# Altium PCB PCB3.PcbDoc
Units mil, origin at the board's own origin, x right, y up, seen from the top; angles counter-clockwise.
Board outline 2560 x 1820 mil, 2 copper layers (Top Layer, Bottom Layer); 9 components, 40 nets, 85 pads, 0 vias.
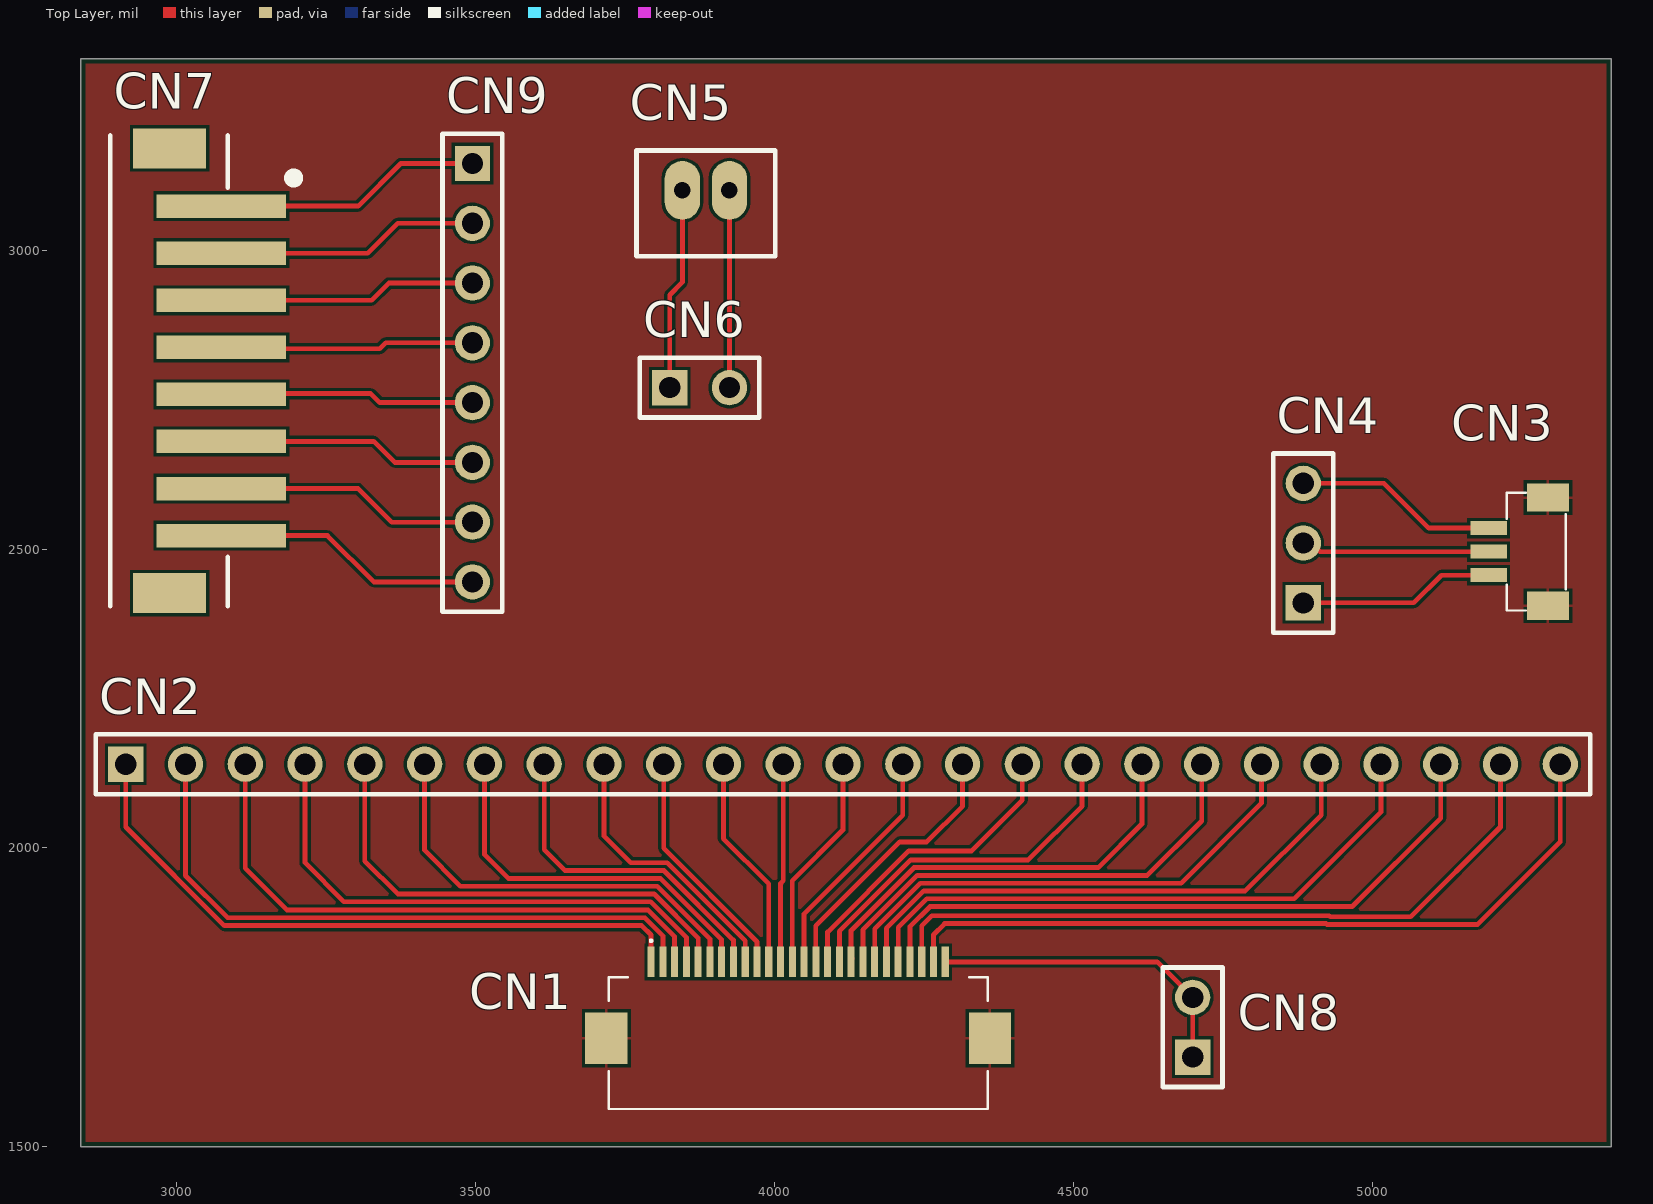
[diagram p0: Top Layer view]
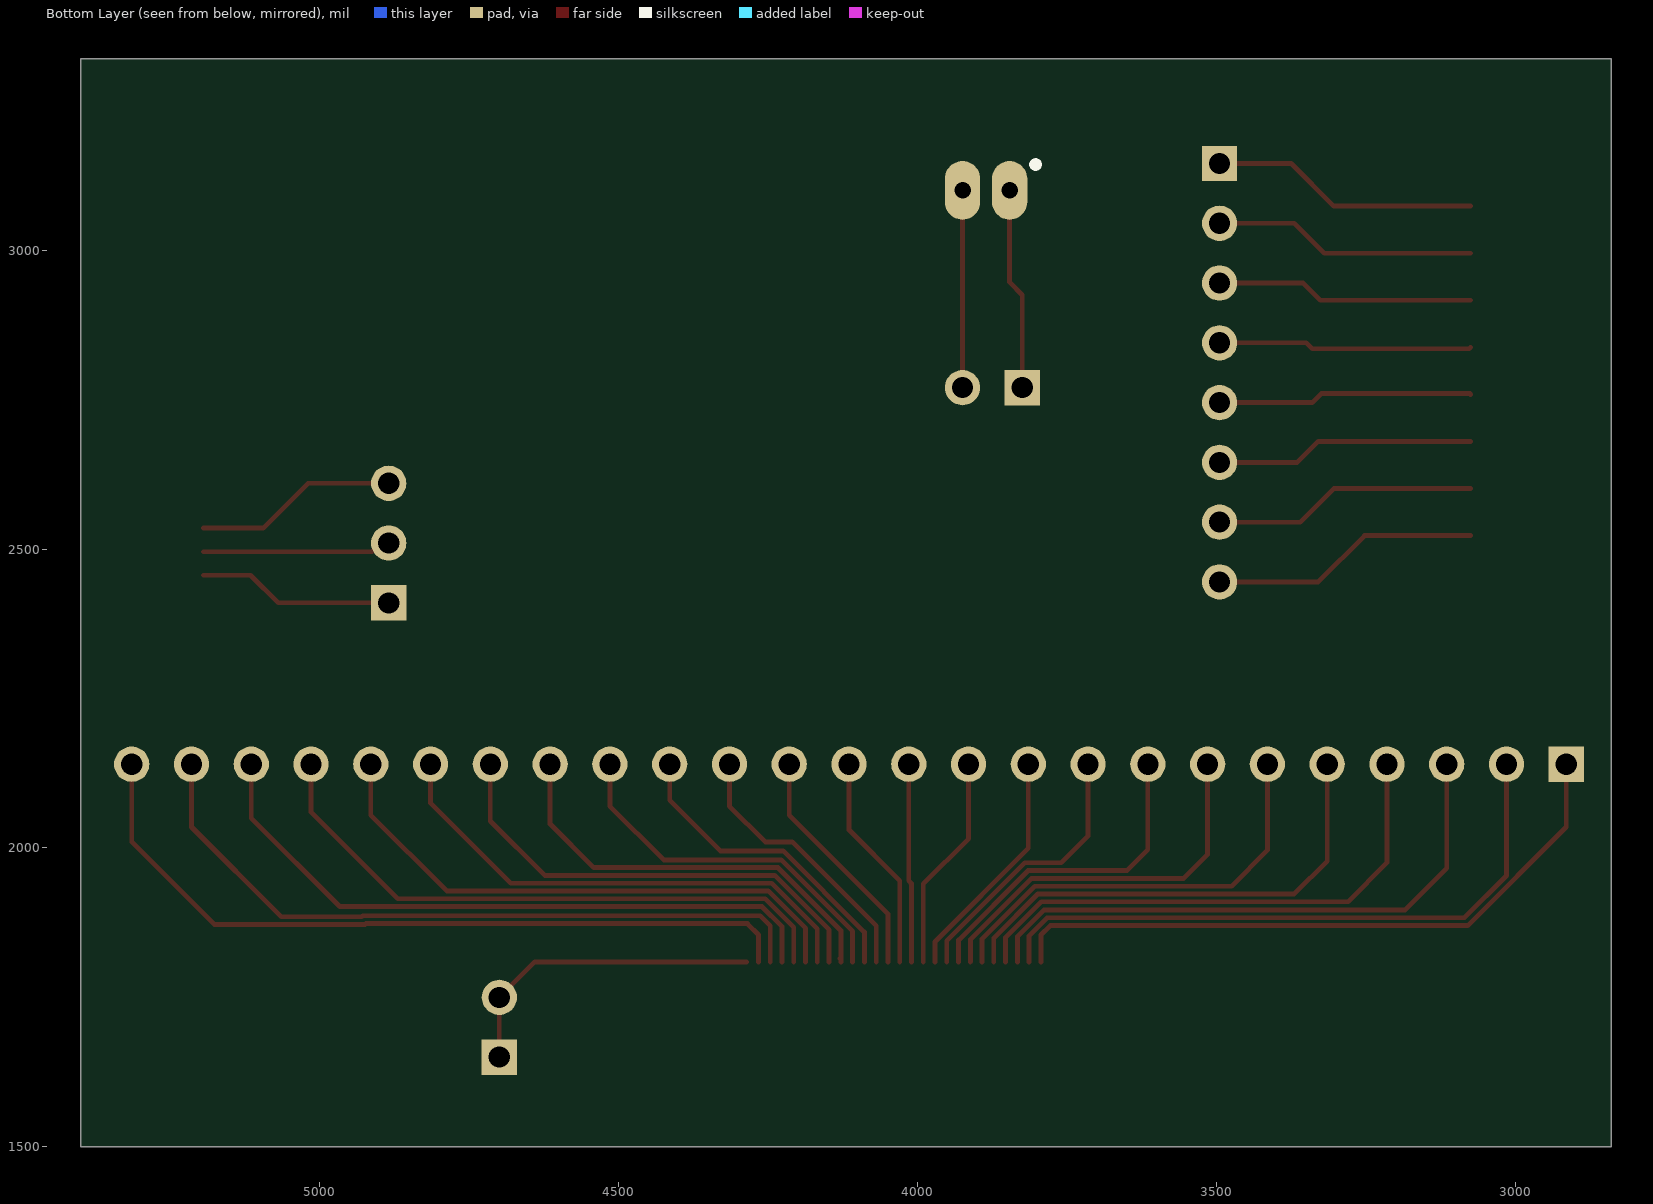
[diagram p1: Bottom Layer view, seen from below]

## Layer stack, top to bottom
Top Solder: solder mask 0.4, Solder Resist, Dk 3.5
Top Layer: signal copper 1.4
Dielectric 1: dielectric 12.6, FR-4, Dk 4.8
Bottom Layer: signal copper 1.4
Bottom Solder: solder mask 0.4, Solder Resist, Dk 3.5

## Board outline
2840,1500 5400,1500 5400,3320 2840,3320

## Design rules (kind name [scope] priority, off if disabled: settings)
BoardOutlineClearance [All] p1: gap=7.87 ignorepadtopadclearanceinfootprint=FALSE
Clearance [All] p1: gap=5 ignorepadtopadclearanceinfootprint=FALSE except(9.84: Arc-Hole Track-Hole SMDPad-Hole THPad-Hole Via-Hole Fill-Hole Poly-Hole Region-Hole Text-Hole)
ComponentClearance [All] p1: gap=5 collisioncheckmode=3 verticalgap=5 showdistances=TRUE
DiffPairsRouting [All] p1: maxlimit=10 minlimit=5 mostfreqgap=5 toplayer_minwidth=5 toplayer_maxwidth=1000 toplayer_prefwidth=5 bottomlayer_minwidth=5 bottomlayer_maxwidth=1000 bottomlayer_prefwidth=5 maxuncoupledlength=500
Height [All] p1: minheight=0 maxheight=71497.94 prefheight=500
HoleSize [All] p1: absolutevalues=TRUE maxlimit=248.03 minlimit=5.91 maxpercent=80.000 minpercent=20.000
HoleToHoleClearance [All] p1: gap=19.68 allowstackedmicrovias=FALSE
MinimumAnnularRing [All] p1: minimumring=3
MinimumSolderMaskSliver [All] p1: minsoldermaskwidth=0
PlaneClearance [All] p1: clearance=5
PlaneConnect PlaneConnectPowerPads [InPadClass('PowerPads')] p1: planeconnectstyle=Direct reliefexpansion=20 reliefentries=4 reliefconductorwidth=10 reliefairgap=10
PlaneConnect [All] p2: pad.planeconnectstyle=Relief pad.reliefexpansion=11.81 pad.reliefentries=4 pad.reliefconductorwidth=5 pad.reliefairgap=5 via.planeconnectstyle=Direct via.reliefexpansion=11.81 via.reliefentries=4 via.reliefconductorwidth=5 via.reliefairgap=5
PolygonConnect PolygonConnectPowerPads [All vs (InPadClass('PowerPads'))] p1: connectstyle=Direct reliefconductorwidth=10 reliefentries=4 polygonreliefangle="90 Angle" airgapwidth=10
PolygonConnect [All] p2: thpad.connectstyle=Relief thpad.reliefconductorwidth=5 thpad.reliefentries=4 thpad.polygonreliefangle="90 Angle" thpad.airgapwidth=5 smdpad.connectstyle=Relief smdpad.reliefconductorwidth=5 smdpad.reliefentries=4 smdpad.polygonreliefangle="90 Angle" smdpad.airgapwidth=5 via.connectstyle=Direct via.reliefconductorwidth=5 via.reliefentries=4 via.polygonreliefangle="90 Angle" via.airgapwidth=5
RoutingVias [All] p1: holewidth=11.81 width=19.68 viastyle="Through Hole" minholewidth=11.81 minwidth=19.68 maxholewidth=11.81 maxwidth=19.68
SilkToSilkClearance [All] p1: silktosilkclearance=0
SilkToSolderMaskClearance [IsPad] p1: minsilkscreentomaskgap=5 clearancetoexposedcopper=TRUE
SolderMaskExpansion [All] p1: expansion=2.95 istentingtop=FALSE
Width [All] p1: maxlimit=1000 minlimit=5 preferedwidth=5 minimp=50.000000 maximp=50.000000 favimp=50.000000
20 further rules are at their usual default settings.

## Components (designator, comment, footprint, x,y, rotation, side; value= is the part's Value field where it differs from the comment)
CN1 "FH12-26S-0.5SH_55_" FH1226S05SH55 4040,1705 r0 top
CN2 "Header 25" HDR1X25 2915,2140 r0 top
CN3 "BM03B-SRSS-TBT_LF__SN_" BM03BSRSSTBTLFSN 5225.51,2495.63 r90 top
CN4 "Header 3" HDR1X3 4885,2410 r90 top
CN5 "B2B-PH-K-S(LF)(SN)" "JST B2B-PH-K" 3885.63,3100 r0 top
CN6 "Header 2" HDR1X2 3825,2770 r0 top
CN7 "B8B-PH-SM4-TB_LF__SN_" B8B-PH-SM4-TB 3075,2916.22 r90 top
CN8 "Header 2" HDR1X2 4700,1650 r90 top
CN9 "Header 8" HDR1X8 3495,3145 r270 top

## Footprints (in the part's own frame and the unit in brackets; to place one, negate y for a bottom-side part, rotate by r counter-clockwise, add the part's x,y. Pads: shape width x height; smd on the part's side, far side on the other; paste and mask are expansions set on the pad)
B8B-PH-SM4-TB [mm]
  rect 1x5.5 smd: 1(4,0) 2(2,0) 3(0,0) 4(-2,0) 5(-4,0) 6(-6,0) 7(-8,0) 8(-10,0)
  rect 1.7x3.1 smd: 9(-12.45,2.2) 10(6.45,2.2)
  silkscreen extent -13,-3.27 7,4.72, body extent -12.97,-2.67 6.98,4.33, height 6.73
BM03BSRSSTBTLFSN [mm]
  rect 0.6x1.55 smd: 1(-1,0.775) 2(0,0.775) 3(1,0.775)
  rect 1.2x1.8 smd: MP1(-2.3,-1.75) MP2(2.3,-1.75)
  silkscreen extent -2.5,-2.5 2.5,0, body extent -2.78,-2.53 2.78,1.49, height 4.35
FH1226S05SH55 [mm]
  rect 0.3x1.3 smd: 1(-6.25,2.65) 2(-5.75,2.65) 3(-5.25,2.65) 4(-4.75,2.65) 5(-4.25,2.65) 6(-3.75,2.65) 7(-3.25,2.65) 8(-2.75,2.65) 9(-2.25,2.65) 10(-1.75,2.65) 11(-1.25,2.65) 12(-0.75,2.65) 13(-0.25,2.65) 14(0.25,2.65) 15(0.75,2.65) 16(1.25,2.65) 17(1.75,2.65) 18(2.25,2.65) 19(2.75,2.65) 20(3.25,2.65) 21(3.75,2.65) 22(4.25,2.65) 23(4.75,2.65) 24(5.25,2.65) 25(5.75,2.65) 26(6.25,2.65)
  rect 1.8x2.2 smd: MP1(-8.15,-0.6) MP2(8.15,-0.6)
  silkscreen extent -8.05,-3.6 8.05,3.6, body extent -8.87,-3.6 8.87,3.27, height 2.3
HDR1X2 [mm] "Connector; Header; 2 Position"
  rect 1.5x1.5 hole 0.9: 1(0,0)
  round 1.5 hole 0.9: 2(2.54,0)
  silkscreen extent -1.27,-1.27 3.81,1.27
HDR1X3 [mm] "Connector; Header; 3 Position"
  rect 1.5x1.5 hole 0.9: 1(0,0)
  round 1.5 hole 0.9: 2(2.54,0) 3(5.08,0)
  silkscreen extent -1.27,-1.27 6.35,1.27
HDR1X8 [mm] "Connector; Header; 8 Position"
  rect 1.5x1.5 hole 0.9: 1(0,0)
  round 1.5 hole 0.9: 2(2.54,0) 3(5.08,0) 4(7.62,0) 5(10.16,0) 6(12.7,0) 7(15.24,0) 8(17.78,0)
  silkscreen extent -1.27,-1.27 19.05,1.27
HDR1X25 [mm] "Connector; Header; 25 Position"
  rect 1.5x1.5 hole 0.9: 1(0,0)
  round 1.5 hole 0.9: 2(2.54,0) 3(5.08,0) 4(7.62,0) 5(10.16,0) 6(12.7,0) 7(15.24,0) 8(17.78,0) 9(20.32,0) 10(22.86,0) 11(25.4,0) 12(27.94,0) 13(30.48,0) 14(33.02,0) 15(35.56,0) 16(38.1,0) 17(40.64,0) 18(43.18,0) 19(45.72,0) 20(48.26,0) 21(50.8,0) 22(53.34,0) 23(55.88,0) 24(58.42,0) 25(60.96,0)
  silkscreen extent -1.27,-1.27 62.23,1.27
"JST B2B-PH-K" [mm]
  oval 1.5x2.5 hole 0.7: 1(-1,0) 2(1,0)
  silkscreen extent -2.95,-2.8 2.95,1.7, body extent -2.95,-2.8 2.95,1.7, height 6

## Part data
CN1: "Connector", Arrow Part Number=FH12-26S-0.5SH(55), Manufacturer_Name=Hirose, Mouser Part Number=798-FH12-26S-0.5SH55, Arrow Price/Stock=https://www.arrow.com/en/products/fh12-26s-0.5sh-55/hirose-electric, Datasheet Link=https://datasheet.datasheetarchive.com/originals/distributors/SFDatasheet-1/sf-00023459.pdf, Height=2.2mm, Manufacturer_Part_Number=FH12-26S-0.5SH(55), Mouser Price/Stock=https://www.mouser.co.uk/ProductDetail/Hirose-Connector/FH12-26S-0.5SH55?qs=Ux3WWAnHpjC%2FipJJsmJDaQ%3D%3D
CN2: "Header, 25-Pin", LatestRevisionDate=17-Jul-2002, LatestRevisionNote="Re-released for DXP Platform.", Publisher="Altium Limited"
CN3: "Connector", Arrow Part Number=BM03B-SRSS-TBT(LF)(SN), Manufacturer_Name="JST (JAPAN SOLDERLESS TERMINALS)", Arrow Price/Stock=https://www.arrow.com/en/products/bm03b-srss-tbt-lf-sn/jst-manufacturing, Datasheet Link=http://www.jst-mfg.com/product/pdf/eng/eSR.pdf, Height=4.25mm, Manufacturer_Part_Number=BM03B-SRSS-TBT(LF)(SN)
CN4: "Header, 3-Pin", LatestRevisionDate=17-Jul-2002, LatestRevisionNote="Re-released for DXP Platform.", Publisher="Altium Limited"
CN5: "CONN HEADER VERT 2POS 2MM", Current Rating (Amps)=2A, Insulation Color=Natural, manufacturer="JST Sales America Inc.", Material Flammability Rating="UL94 V-0", Operating Temperature="-25°C ~ 85°C", Supplier Part Number 1=455-1704-ND, Voltage Rating=100V, componentlink1description=Datasheet, componentlink1url=http://www.jst-mfg.com/product/pdf/eng/ePH.pdf, componentlink2description="DigiKey Link", componentlink2url=http://digikey.com/product-detail/en/jst-sales-america-inc/B2B-PH-K-S-LF-SN/455-1704-ND/926611, Connector Type=Header, Contact Finish - Mating=Tin, Contact Finish - Post=Tin, Contact Length - Mating="0.130\" (3.30mm)", Contact Length - Post="0.134\" (3.40mm)", Contact Material=Brass, Contact Shape=Square, Contact Type="Male Pin", Fastening Type="Detent Lock", Insulation Height="0.236\" (6.00mm)", Insulation Material="Polyamide (PA66), Nylon 6/6", lastupdated="1/3/2020 11:40:58 PM", Lifecycle Status=Active, Minimum Order=1, Mounting Type="Through Hole", Number of Positions=2, Number of Positions Loaded=All, Number of Rows=1, Overall Contact Length="0.333\" (8.45mm)", packaging=Bulk, Part Number=B2B-PH-K-S(LF)(SN), Part Status=Active, partid=11, Pitch - Mating="0.079\" (2.00mm)", price=0.17, series=PH, Shrouding="Shrouded - 4 Wall", Style="Board to Cable/Wire", Supplier 1=DigiKey, Termination="Press-Fit, Solder"
CN6 CN8: "Header, 2-Pin", LatestRevisionDate=17-Jul-2002, LatestRevisionNote="Re-released for DXP Platform.", Publisher="Altium Limited"
CN7: "Connector", Arrow Part Number=B8B-PH-SM4-TB(LF)(SN), Manufacturer_Name="JST (JAPAN SOLDERLESS TERMINALS)", Arrow Price/Stock=https://www.arrow.com/en/products/b8b-ph-sm4-tb-lf-sn/jst-manufacturing?region=europe, Datasheet Link=http://uk.rs-online.com/web/p/products/6881347, Manufacturer_Part_Number=B8B-PH-SM4-TB(LF)(SN)
CN9: "Header, 8-Pin", LatestRevisionDate=17-Jul-2002, LatestRevisionNote="Re-released for DXP Platform.", Publisher="Altium Limited"

## Nets (pads, with @x,y where several pads share a name; then routed paths per layer and width w, separated by ;. In a path a pad name is that pad's centre, name@x,y a point inside that pad or via, vN(x,y) a via of type N, cw(c..) or ccw(c..) an arc to the next point about the centre after c; other vN are vias at no path point)
GND: CN1.MP1 CN1.MP2 CN3.MP1 CN3.MP2
NetCN1_1: CN1.1 CN2.1 | length 1103.8
  Top Layer w8: CN2.1 2915,2035 3080,1870 3778.23,1870 3793.94,1854.29 CN1.1
NetCN1_2: CN1.2 CN2.2 | length 1070.5
  Top Layer w8: CN2.2 3015,1953.38 3085.38,1883 3783.62,1883 3813.62,1852.99 CN1.2
NetCN1_3: CN1.3 CN2.3 | length 982
  Top Layer w8: CN2.3 3115,1966 3185,1896 3789,1896 3833.31,1851.69 CN1.3
NetCN1_4: CN1.4 CN2.4 | length 895.7
  Top Layer w8: CN2.4 3215,1975 3280,1910 3793.38,1910 3852.99,1850.39 CN1.4
NetCN1_5: CN1.5 CN2.5 | length 812.8
  Top Layer w8: CN2.5 3315,1978 3370,1923 3798.77,1923 3872.68,1849.09 CN1.5
NetCN1_6: CN1.6 CN2.6 | length 721.2
  Top Layer w8: CN2.6 3415,1996 3475,1936 3804.15,1936 3892.36,1847.79 CN1.6
NetCN1_7: CN1.7 CN2.7 | length 644.2
  Top Layer w8: CN2.7 3515,1989 3555,1949 3809.54,1949 3911.62,1846.92 3911.62,1809.76 CN1.7
NetCN1_8: CN1.8 CN2.8 | length 567.1
  Top Layer w8: CN2.8 3605,2130 3615,2120 3615,1997 3650,1962 3815.51,1962 3931.73,1845.78 CN1.8
NetCN1_9: CN1.9 CN2.9 | length 464.3
  Top Layer w8: CN2.9 3715,2020 3760,1975 3820.9,1975 3951.42,1844.48 CN1.9
NetCN1_10: CN1.10 CN2.10 | length 395.3
  Top Layer w8: CN2.10 3815,1999.28 3971.1,1843.18 CN1.10
NetCN1_11: CN1.11 CN2.11 | length 362.1
  Top Layer w8: CN2.11 3915,2015.49 3990.79,1939.71 CN1.11
NetCN1_12: CN1.12 CN2.12 | length 332.5
  Top Layer w8: CN1.12 4010.47,1940.47 4015,1945 CN2.12
NetCN1_13: CN1.13 CN2.13 | length 365.8
  Top Layer w8: CN1.13 4030.16,1945.16 4115,2030 CN2.13
NetCN1_14: CN1.14 CN2.14 | length 406.2
  Top Layer w8: CN1.14 4049.84,1889.84 4215,2055 4215,2135 4220,2140 CN2.14
NetCN1_15: CN1.15 CN2.15 | length 458.7
  Top Layer w8: CN1.15 4069.53,1869.53 4210,2010 4255,2010 4315,2070 CN2.15
NetCN1_16: CN1.16 CN2.16 | length 527.1
  Top Layer w8: CN1.16 4089.21,1859.21 4225,1995 4330,1995 4415,2080 CN2.16
NetCN1_17: CN1.17 CN2.17 | length 614.1
  Top Layer w8: CN1.17 4108.9,1860.51 4228.38,1980 4425,1980 4515,2070 CN2.17
NetCN1_18: CN1.18 CN2.18 | length 713.9
  Top Layer w8: CN1.18 4128.58,1813.58 4130,1815 4128.58,1816.42 4128.58,1861.81 4233.77,1967 4542,1967 4615,2040 CN2.18
NetCN1_19: CN1.19 CN2.19 | length 790.9
  Top Layer w8: CN1.19 4148.27,1863.11 4239.15,1954 4624,1954 4715,2045 CN2.19
NetCN1_20: CN1.20 CN2.20 | length 854.4
  Top Layer w8: CN1.20 4167.95,1864.41 4244.54,1941 4681,1941 4815,2075 CN2.20
NetCN1_21: CN1.21 CN2.21 | length 947.2
  Top Layer w8: CN1.21 4187.64,1865.71 4249.92,1928 4788,1928 4915,2055 CN2.21
NetCN1_22: CN1.22 CN2.22 | length 1025.3
  Top Layer w8: CN1.22 4207.32,1867.01 4255.31,1915 4870,1915 5015,2060 CN2.22
NetCN1_23: CN1.23 CN2.23 | length 1112.2
  Top Layer w8: CN1.23 4227.01,1868.32 4260.69,1902 4967,1902 5115,2050 CN2.23
NetCN1_24: CN1.24 CN2.24 | length 1203.3
  Top Layer w8: CN1.24 4246.69,1869.62 4263.54,1886.46 4928.54,1886.46 4930,1885 5065,1885 5215,2035 CN2.24
NetCN1_25: CN1.25 CN2.25 | length 1289.6
  Top Layer w8: CN1.25 4266.38,1854.84 4285,1873.46 4923.15,1873.46 4924.62,1872 5177,1872 5315,2010 CN2.25
NetCN1_26: CN1.26 CN8.1 CN8.2 | length 538.5
  Top Layer w8: CN1.26 4640.67,1809.33 CN8.2 CN8.1
NetCN3_1: CN3.1 CN4.1 | length 329.2
  Top Layer w8: CN4.1 5070,2410 5116.26,2456.26 CN3.1
NetCN3_2: CN3.2 CN4.2 | length 316
  Top Layer w8: CN4.2 4898.82,2510 4913.19,2495.63 CN3.2
NetCN3_3: CN3.3 CN4.3 | length 341.1
  Top Layer w8: CN4.3 5020,2610 5095,2535 CN3.3
NetCN5_1: CN5.1 CN6.1 | length 338.8
  Top Layer w8: CN6.1 3825,2925 3846.26,2946.26 CN5.1
NetCN5_2: CN5.2 CN6.2 | length 330
  Top Layer w8: CN6.2 CN5.2
NetCN7_1: CN7.1 CN9.1 | length 449.5
  Top Layer w8: CN7.1 3303.7,3073.7 3375,3145 CN9.1
NetCN7_2: CN7.2 CN9.2 | length 450.7
  Top Layer w8: CN7.2 3319.96,2994.96 3370,3045 CN9.2 CN9.2@3505,3045
NetCN7_3: CN7.3 CN9.3 | length 431.9
  Top Layer w8: CN7.3 3326.22,2916.22 3355,2945 CN9.3
NetCN7_4: CN7.4 CN9.4 | length 425.2
  Top Layer w8: CN7.4 3077.48,2835 3340,2835 3350,2845 CN9.4
NetCN7_5: CN7.5 CN9.5 | length 426.7
  Top Layer w8: CN7.5 3076.26,2760 3325,2760 3340,2745 CN9.5
NetCN7_6: CN7.6 CN9.6 | length 434.5
  Top Layer w8: CN7.6 3330,2680 3365,2645 CN9.6
NetCN7_7: CN7.7 CN9.7 | length 443.3
  Top Layer w8: CN7.7 3303.74,2601.26 3360,2545 CN9.7
NetCN7_8: CN7.8 CN9.8 | length 452.1
  Top Layer w8: CN7.8 3252.48,2522.52 3330,2445 CN9.8
pads on no net: CN7.9 CN7.10

## Polygon pours and split planes (outlines as drawn)
GND on Top Layer "VDDA" (solid, pour order 0): 2840,1500 5400,1500 5400,3320 2840,3320

## Silkscreen, mask and mechanical layers (free items; w line width, h text height)
Mechanical 13:
  lines w5: 2840,1500 5400,1500 5400,3200 5400,3320 2840,3320 2840,2620 2840,1500